# EAGLE board General IO (EAGLE 4.13), part 1 of 2
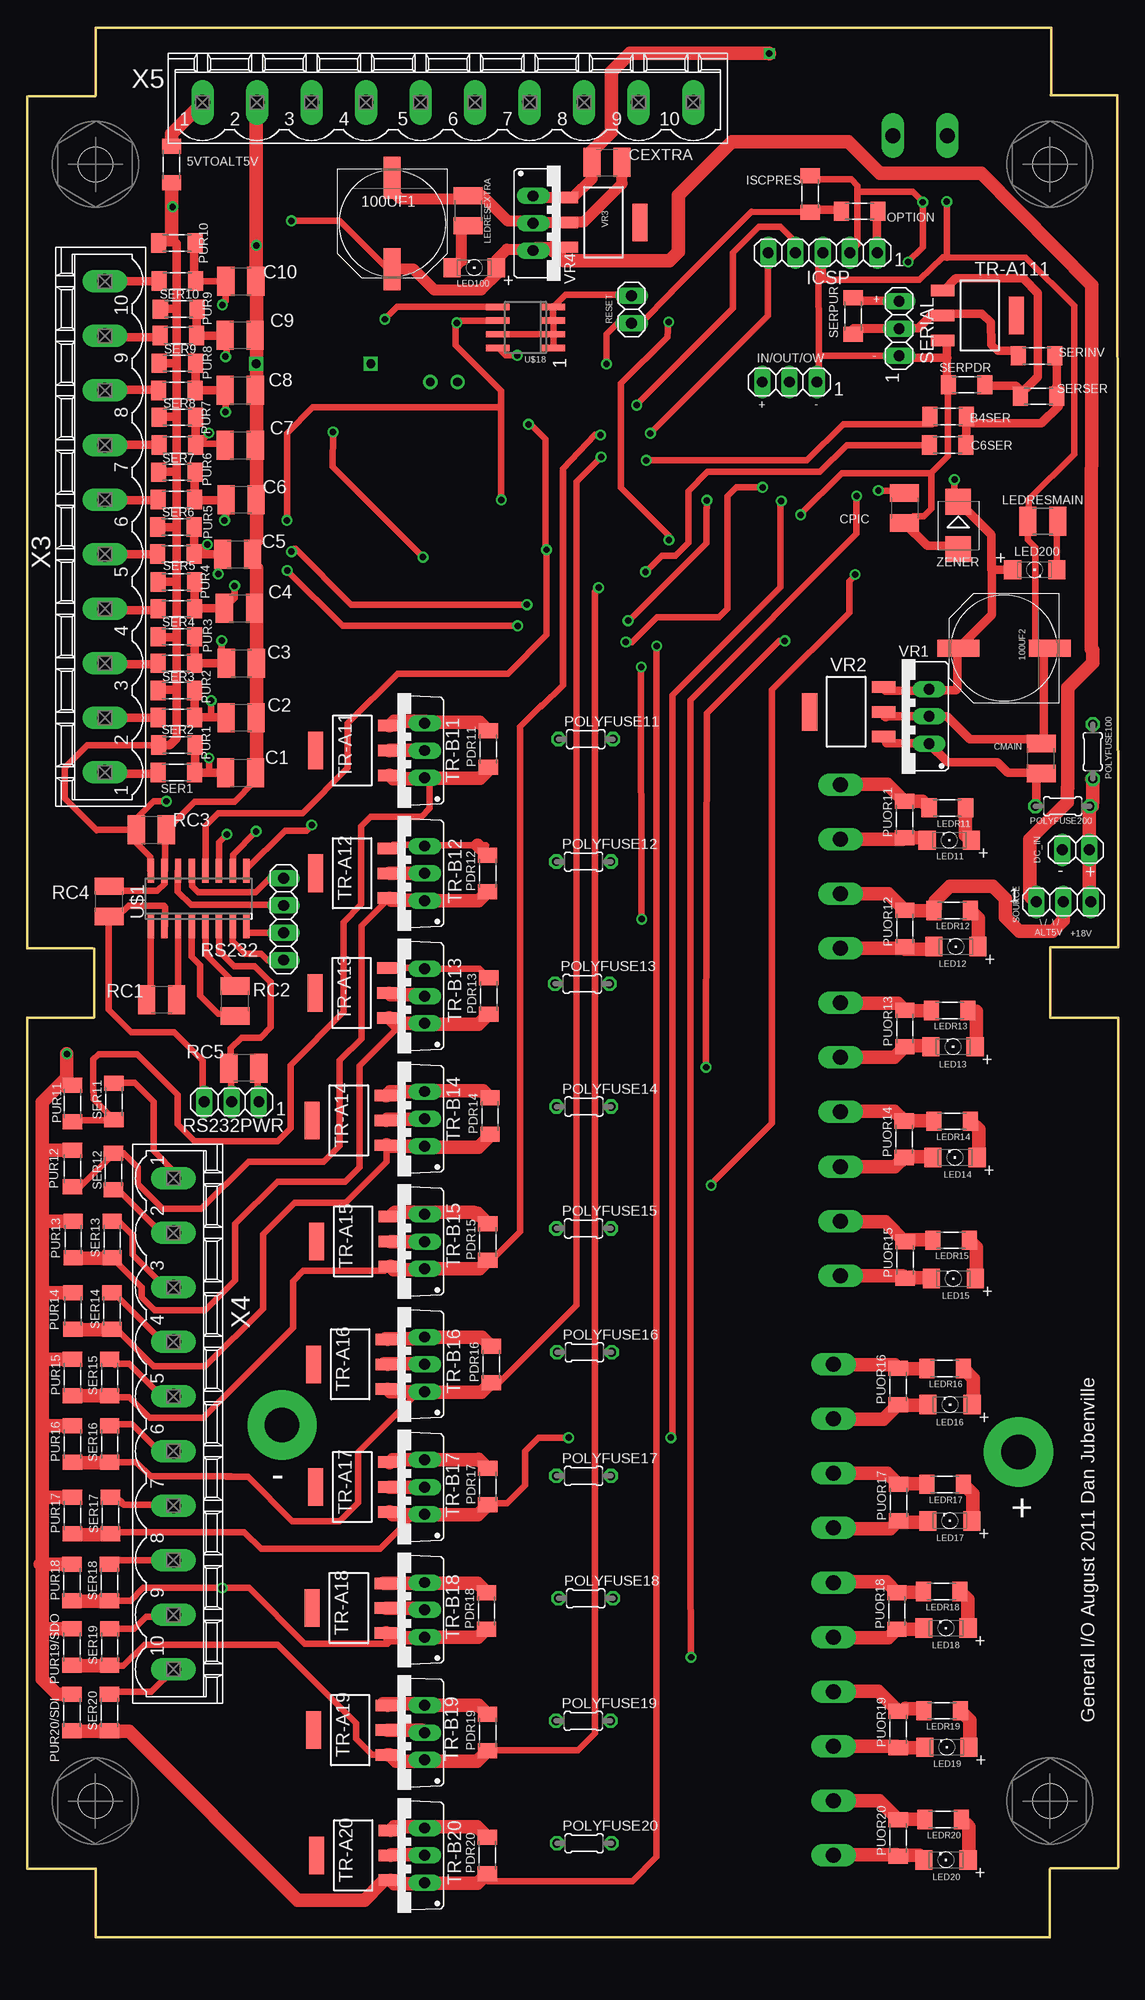
[diagram p0: board, top side]
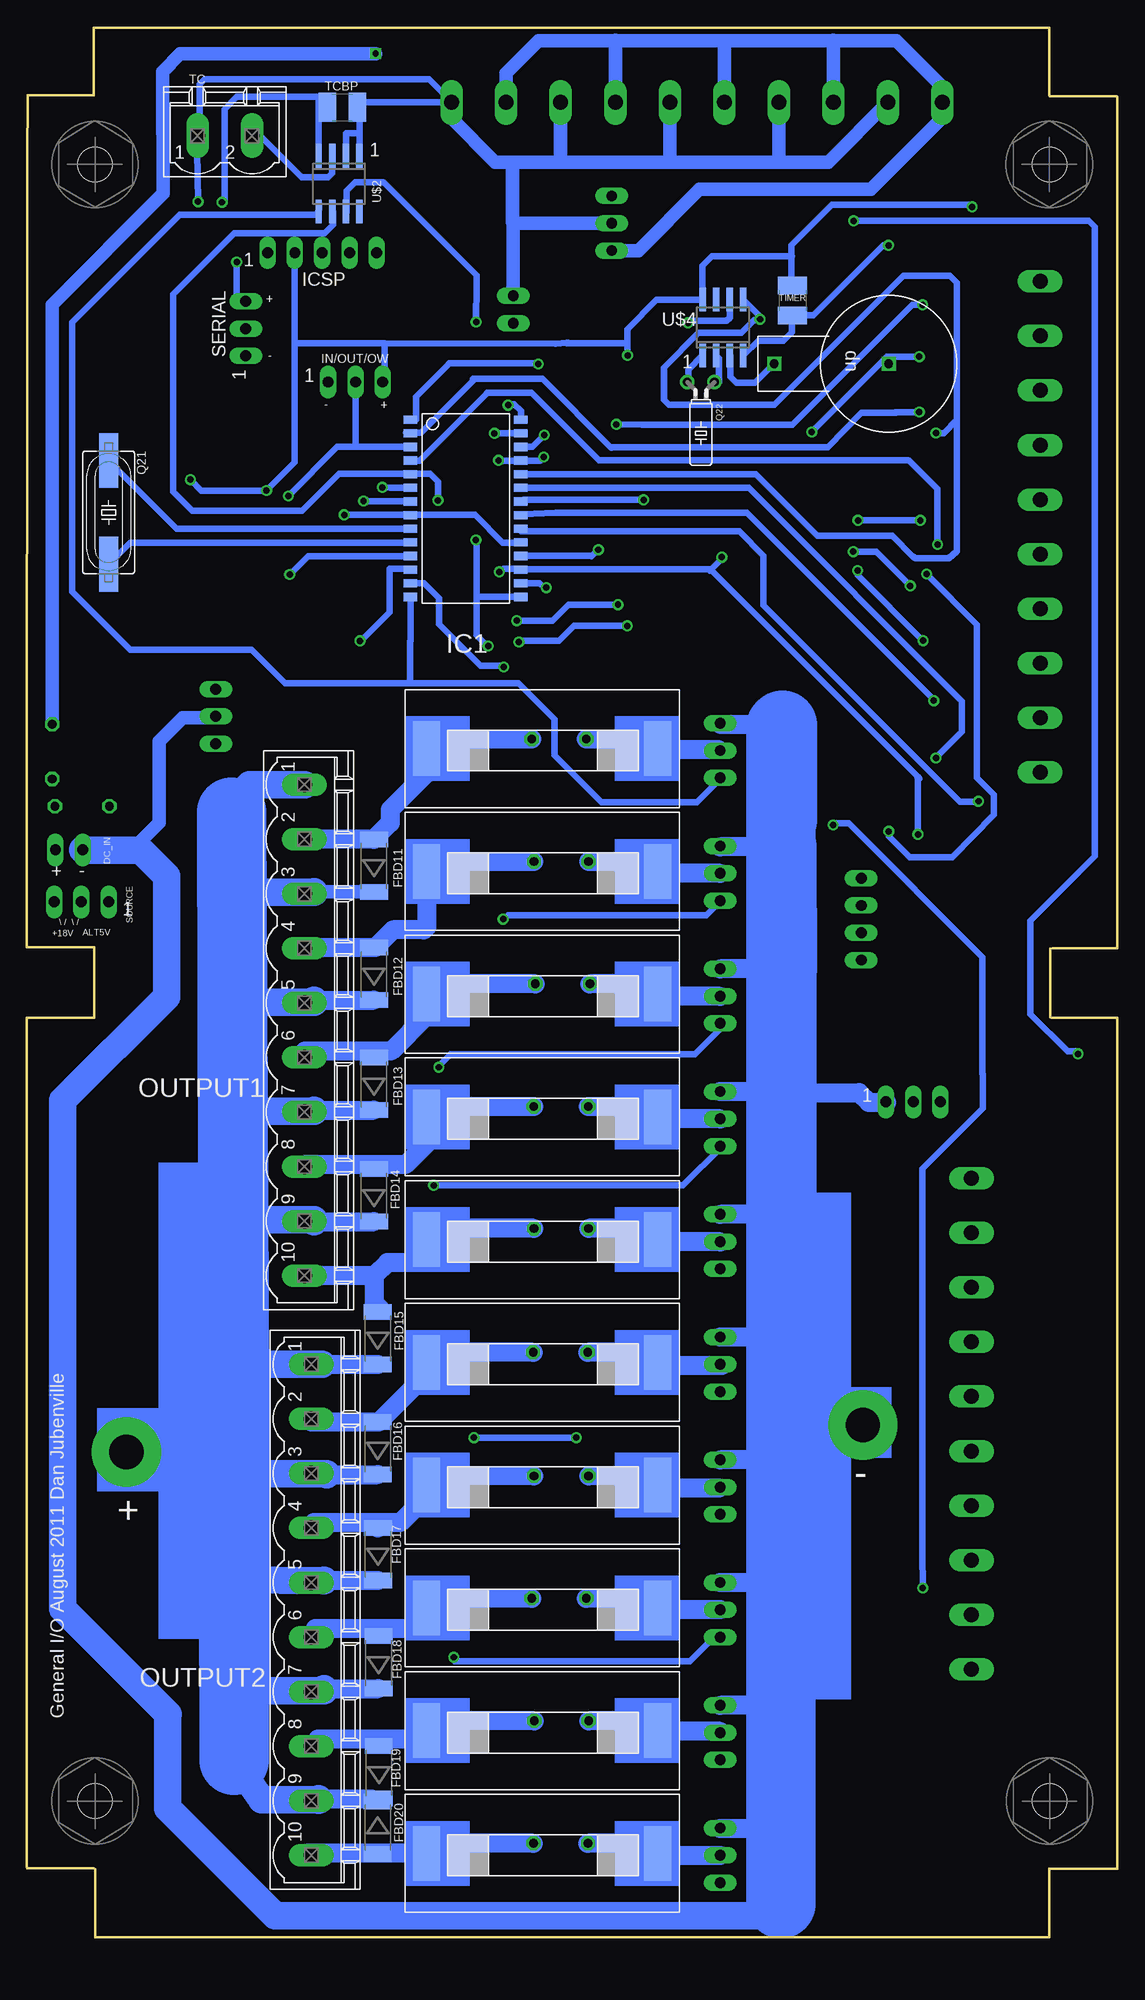
[diagram p1: board, bottom side, seen from below]

Size 101.6 x 177.83 mm. Coordinates in mm from the lower left corner, seen from the top.
Outline: 6.38,0 6.38,6.38 0,6.38 0,85.62 6.17,85.62 6.25,85.7 6.25,92.08 6.04,92.13 0.03,92.13 0,92.1 0,171.37 0.08,171.45 6.3,171.45 6.38,171.53 6.38,177.82 95.38,177.82 95.38,171.68 95.35,171.53 101.52,171.53 101.55,165.43 101.6,92.2 95.3,92.2 95.3,85.62 101.6,85.62 101.6,6.53 101.55,6.45 95.35,6.45 95.22,6.33 95.22,0 6.4,0
Copper layers (1*16): Top 0.035mm / dielectric 1.5mm / Bottom 0.035mm
Design rules "default": minimum track width 15mil, minimum drill 20mil, track to track 15mil, track to pad 15mil, pad to pad 15mil, via to via 15mil, smd to smd 0mil, copper to edge 5mil, drill to drill 5mil, minimum pad ring 10mil, minimum via ring 8mil, stop-mask expansion 4mil, vias tented up to drill 0mil, thermal gap 10mil

## Footprints (pad centres in the part's own frame; a part is rotated, then mirrored left to right if it is on the bottom)
M1406 = smd 1.4 x 1.8: 1 -1.7,0; 2 1.7,0
PANASONIC_G = smd 3.9 x 1.6: + 4.25,0; - -4.25,0
BH-401 = drill 0.8 square: P$1 0,0; P$2 0,10.668
C1210 = smd 1.6 x 2.7: 1 -1.4,0; 2 1.4,0
1X02 = drill 1.016 long: 1 -1.27,0; 2 1.27,0
SOD87 = smd 1.45 x 2.6: 1 -2.445,0; 2 2.445,0
FUSE = smd 2.54 x 5.08: P$1 2,5.54; P$2 23.54,5.54
SO-28W = smd 0.762 x 1.27: 1 -7.62,-5.207; 2 -6.35,-5.207; 3 -5.08,-5.207; 4 -3.81,-5.207; 5 -2.54,-5.207; 6 -1.27,-5.207; 7 0,-5.207; 8 1.27,-5.207; 9 2.54,-5.207; 10 3.81,-5.207; 11 5.08,-5.207; 12 6.35,-5.207; 13 7.62,-5.207; 14 8.89,-5.207; 15 8.89,5.08; 16 7.62,5.08; 17 6.35,5.08; 18 5.08,5.08; 19 3.81,5.08; 20 2.54,5.08; 21 1.27,5.08; 22 0,5.08; 23 -1.27,5.08; 24 -2.54,5.08; 25 -3.81,5.08; 26 -5.08,5.08; 27 -6.35,5.08; 28 -7.62,5.08
1X05 = drill 1.016 long: 1 -5.08,0; 2 -2.54,0; 3 0,0; 4 2.54,0; 5 5.08,0
1X03 = drill 1.016 long: 1 -2.54,0; 2 0,0; 3 2.54,0
1206 = smd 1.6 x 1.803: + -1.422,0; - 2.692,0
R1210 = smd 1.6 x 2.7: 1 -1.4,0; 2 1.4,0
MSTBV10 = drill 1.397 long: 1 -22.86,0; 2 -17.78,0; 3 -12.7,0; 4 -7.62,0; 5 -2.54,0; 6 2.54,0; 7 7.62,0; 8 12.7,0; 9 17.78,0; 10 22.86,0
0204/5 = drill 0.813 octagon: 1 -2.54,0; 2 2.54,0
SM49 = smd 5.08 x 1.778: 1 -4.826,0; 2 4.826,0
TC26H = drill 0.813 round: 1 -1.27,0; 2 1.27,0
1X04 = drill 1.016 long: 1 -3.81,0; 2 -1.27,0; 3 1.27,0; 4 3.81,0
MSTBV2 = drill 1.397 long: 1 -2.54,0; 2 2.54,0
SOT223R_INFINEON = smd 1.067 x 2.184: 1 -2.311,-3.479; 2 0,-3.48; 3 2.312,-3.48 | smd 3.5 x 1.4: 4 0,3.404
TO220BV = drill 1.016 long: D 0,-2.54; G -2.54,-2.54; S 2.54,-2.54
SO16 = smd 0.6 x 2.2: 1 -4.445,-2.6; 2 -3.175,-2.6; 3 -1.905,-2.6; 4 -0.635,-2.6; 5 0.635,-2.6; 6 1.905,-2.6; 7 3.175,-2.6; 8 4.445,-2.6; 9 4.445,2.6; 10 3.175,2.6; 11 1.905,2.6; 12 0.635,2.6; 13 -0.635,2.6; 14 -1.905,2.6; 15 -3.175,2.6; 16 -4.445,2.6
SO08 = smd 0.6 x 2.2: 1 -1.905,-2.6; 2 -0.635,-2.6; 3 0.635,-2.6; 4 1.905,-2.6; 5 1.905,2.6; 6 0.635,2.6; 7 -0.635,2.6; 8 -1.905,2.6
SCREW = hole 3.2: 0,0
TO220S = drill 1.016 long: 1 -2.54,-2.54; 2 0,-2.54; 3 2.54,-2.54
SMB = smd 2.4 x 2.4: A 2.2,0; C -2.2,0

## Placement (x,y rotation side)
5VTOALT5V  0  [M1406]  13.44,165.07 270 top
100UF1  Extra power  [PANASONIC_G]  33.99,159.59 270 top
100UF2  Main Power  [PANASONIC_G]  90.98,120.04 180 top
B4SER  [M1406]  85.78,141.63 180 top
BAT1  BH-401  [BH-401]  31.98,146.53 270 bottom
C1  .1uf  [C1210]  19.86,108.46 0 top
C2  .1uf  [C1210]  19.91,113.59 0 top
C3  .1uf  [C1210]  19.94,118.64 0 top
C4  .1uf  [C1210]  19.76,123.77 0 top
C5  .1uf  [C1210]  19.58,128.8 0 top
C6  .1uf  [C1210]  19.91,133.88 0 top
C6SER  [M1406]  85.72,138.96 0 top
C7  .1uf  [C1210]  19.84,138.94 0 top
C8  .1uf  [C1210]  19.84,144.07 0 top
C9  .1uf  [C1210]  19.81,149.2 0 top
C10  .1uf  [C1210]  19.89,154.2 0 top
CEXTRA  .1uf Extra power  [C1210]  54,165.28 0 top
CMAIN  .1uf main  [C1210]  94.44,109.78 90 top
CPIC  .1uf PIC Bypass  [C1210]  81.71,133.1 270 top
DC_IN  [1X02]  97.66,101.27 180 top
FBD11  [SOD87]  69.27,99.8 90 bottom
FBD12  [SOD87]  69.27,89.71 90 bottom
FBD13  [SOD87]  69.27,79.48 90 bottom
FBD14  [SOD87]  69.27,69.09 90 bottom
FBD15  [SOD87]  68.91,55.8 90 bottom
FBD16  [SOD87]  68.91,45.54 90 bottom
FBD17  [SOD87]  68.88,35.69 90 bottom
FBD18  [SOD87]  68.83,25.6 90 bottom
FBD19  [SOD87]  68.81,15.37 90 bottom
FBD20  [SOD87]  68.91,10.21 270 bottom
FUSE9  FUSE(SM)  [FUSE]  40.82,24.79 180 bottom
FUSE11  FUSE(SM)  [FUSE]  40.82,116.23 180 bottom
FUSE12  FUSE(SM)  [FUSE]  40.82,104.8 180 bottom
FUSE13  FUSE(SM)  [FUSE]  40.82,93.37 180 bottom
FUSE14  FUSE(SM)  [FUSE]  40.82,81.94 180 bottom
FUSE15  FUSE(SM)  [FUSE]  40.82,70.51 180 bottom
FUSE16  FUSE(SM)  [FUSE]  40.82,59.08 180 bottom
FUSE17  FUSE(SM)  [FUSE]  40.82,47.65 180 bottom
FUSE18  FUSE(SM)  [FUSE]  40.82,36.22 180 bottom
FUSE20  FUSE(SM)  [FUSE]  40.82,13.36 180 bottom
IC1  PIC16F876ASO  [SO-28W]  60.66,133.71 270 bottom
ICSP  [1X05]  74.09,156.87 180 top
IN/OUT/OW  [1X03]  70.99,144.83 180 top
ISCPRES  10k  [M1406]  72.92,162.36 90 top
LED11  [1206]  86.51,102.16 180 top
LED12  [1206]  87.12,92.25 180 top
LED13  [1206]  86.87,82.93 180 top
LED14  [1206]  87.05,72.62 180 top
LED15  [1206]  86.89,61.34 180 top
LED16  [1206]  86.59,49.61 180 top
LED17  [1206]  86.56,38.79 180 top
LED18  [1206]  86.21,28.8 180 top
LED19  [1206]  86.28,17.7 180 top
LED20  [1206]  86.21,7.21 180 top
LED100  Extra Power  [1206]  42.27,155.47 180 top
LED200  Main power  [1206]  93.19,127.36 0 top
LEDR11  [M1406]  85.7,105.18 180 top
LEDR12  [M1406]  86.13,95.63 180 top
LEDR13  [M1406]  85.93,86.31 180 top
LEDR14  [M1406]  86.16,76 180 top
LEDR15  [M1406]  86.06,64.92 180 top
LEDR16  [M1406]  85.47,52.98 180 top
LEDR17  [M1406]  85.47,42.19 180 top
LEDR18  [M1406]  85.17,32.21 180 top
LEDR19  [M1406]  85.22,21.11 180 top
LEDR20  [M1406]  85.29,10.97 180 top
LEDRESEXTRA  [R1210]  41.07,160.78 90 top
LEDRESMAIN  [R1210]  94.59,131.85 180 top
OPTION  470  [M1406]  77.52,160.73 0 top
OUTPUT1  MSTBV10  [MSTBV10]  75.74,84.48 270 bottom
OUTPUT2  MSTBV10  [MSTBV10]  75.11,30.51 270 bottom
PDR11  [M1406]  42.93,110.64 90 top
PDR12  [M1406]  42.88,99.09 90 top
PDR13  [M1406]  42.98,87.66 90 top
PDR14  [M1406]  43.1,76.48 90 top
PDR15  [M1406]  42.9,64.74 90 top
PDR16  [M1406]  43.21,53.37 90 top
PDR17  [M1406]  42.9,41.99 90 top
PDR18  [M1406]  42.77,30.4 90 top
PDR19  [M1406]  42.88,19.08 90 top
PDR20  [M1406]  42.85,7.65 90 top
POLYFUSE11  [0204/5]  52.02,111.58 0 top
POLYFUSE12  [0204/5]  51.82,100.18 0 top
POLYFUSE13  [0204/5]  51.69,88.8 0 top
POLYFUSE14  [0204/5]  51.84,77.37 0 top
POLYFUSE15  [0204/5]  51.82,66.01 0 top
POLYFUSE16  [0204/5]  51.89,54.48 0 top
POLYFUSE17  [0204/5]  51.82,42.98 0 top
POLYFUSE18  [0204/5]  52.02,31.57 0 top
POLYFUSE19  [0204/5]  51.79,20.17 0 top
POLYFUSE20  [0204/5]  51.87,8.76 0 top
POLYFUSE100  Extra Power  [0204/5]  99.24,110.41 90 top
POLYFUSE200  Main power  [0204/5]  96.44,105.33 180 top
PUOR11  [M1406]  81.71,104.09 90 top
PUOR12  [M1406]  81.74,93.93 90 top
PUOR13  [M1406]  81.74,84.63 90 top
PUOR14  [M1406]  81.69,74.32 90 top
PUOR15  [M1406]  81.76,63.09 90 top
PUOR16  [M1406]  81.1,51.31 90 top
PUOR17  [M1406]  81.15,40.49 90 top
PUOR18  [M1406]  81,30.4 90 top
PUOR19  [M1406]  81.13,19.38 90 top
PUOR20  [M1406]  81.13,9.27 90 top
PUR1  [M1406]  13.94,111.02 0 top
PUR2  [M1406]  13.89,116.1 0 top
PUR3  [M1406]  13.89,121.11 0 top
PUR4  [M1406]  13.87,126.21 0 top
PUR5  [M1406]  13.84,131.32 0 top
PUR6  [M1406]  13.92,136.42 0 top
PUR7  [M1406]  13.97,141.55 0 top
PUR8  [M1406]  14,146.58 0 top
PUR9  [M1406]  14.1,151.61 0 top
PUR10  [M1406]  13.92,157.78 0 top
PUR11  [M1406]  4.22,77.65 270 top
PUR12  [M1406]  4.19,71.58 270 top
PUR13  [M1406]  4.27,65 270 top
PUR14  [M1406]  4.24,58.32 270 top
PUR15  [M1406]  4.22,52.15 90 top
PUR16  [M1406]  4.19,45.95 90 top
PUR17  [M1406]  4.19,39.29 90 top
PUR18  [M1406]  4.17,33.05 90 top
PUR19/SDO  [M1406]  4.17,27.05 90 top
PUR20/SDI  [M1406]  4.17,20.93 90 top
Q21  20MHz  [SM49]  93.98,132.69 270 bottom
Q22  32.768kHz  [TC26H]  38.81,144.83 180 bottom
RC1  1uf  [C1210]  12.52,87.33 0 top
RC2  1uf  [C1210]  19.35,87.2 90 top
RC3  1uf  [C1210]  11.56,103.15 0 top
RC4  1uf  [C1210]  7.62,96.47 90 top
RC5  1uf  [C1210]  20.17,80.95 180 top
RESET  [1X02]  56.29,151.59 270 top
RS232  [1X04]  23.88,94.82 90 top
RS232PWR  [1X03]  19.02,77.8 180 top
SER1  [M1406]  13.89,108.46 0 top
SER2  [M1406]  13.89,113.59 0 top
SER3  [M1406]  13.87,118.64 0 top
SER4  [M1406]  13.89,123.72 0 top
SER5  [M1406]  13.84,128.8 0 top
SER6  [M1406]  13.89,133.88 0 top
SER7  [M1406]  14,138.96 180 top
SER8  [M1406]  13.94,144.04 180 top
SER9  [M1406]  14.07,149.15 0 top
SER10  [M1406]  14,154.23 0 top
SER11  [M1406]  8.08,77.83 90 top
SER12  [M1406]  8.03,71.32 270 top
SER13  [M1406]  7.9,64.97 90 top
SER14  [M1406]  7.87,58.32 90 top
SER15  [M1406]  7.67,52.15 90 top
SER16  [M1406]  7.67,45.95 90 top
SER17  [M1406]  7.75,39.29 90 top
SER18  [M1406]  7.65,33.05 90 top
SER19  [M1406]  7.67,27.05 90 top
SER20  [M1406]  7.65,20.93 90 top
SERIAL  [1X03]  81.2,149.81 90 top
SERINV  [M1406]  94.03,147.27 180 top
SERPDR  220k  [M1406]  87.48,144.58 180 top
SERPUR  47k  [M1406]  76.91,150.98 270 top
SERSER  100k  [M1406]  94.18,143.51 180 top
SOURCE  [1X03]  96.52,96.42 0 top
TC  Type K  [MSTBV2]  83.16,167.77 0 bottom
TCBP  .1uf TC Bypass  [C1210]  72.21,170.41 0 bottom
TIMER  .1uf Timer Bypass  [C1210]  30.28,152.43 270 bottom
TR-A11  [SOT223R_INFINEON]  30.28,110.52 90 top
TR-A12  [SOT223R_INFINEON]  30.25,99.09 90 top
TR-A13  [SOT223R_INFINEON]  30.2,87.93 90 top
TR-A14  [SOT223R_INFINEON]  29.95,76.07 90 top
TR-A15  [SOT223R_INFINEON]  30.35,64.8 90 top
TR-A16  [SOT223R_INFINEON]  30.07,53.37 90 top
TR-A17  [SOT223R_INFINEON]  30.28,41.94 90 top
TR-A18  [SOT223R_INFINEON]  29.95,30.66 90 top
TR-A19  [SOT223R_INFINEON]  30.07,19.3 90 top
TR-A20  [SOT223R_INFINEON]  30.35,7.65 90 top
TR-A111  [SOT223R_INFINEON]  88.72,151.03 270 top
TR-B11  [TO220BV]  34.47,110.52 90 top
TR-B12  [TO220BV]  34.47,99.09 90 top
TR-B13  [TO220BV]  34.47,87.66 90 top
TR-B14  [TO220BV]  34.47,76.23 90 top
TR-B15  [TO220BV]  34.47,64.8 90 top
TR-B16  [TO220BV]  34.47,53.37 90 top
TR-B17  [TO220BV]  34.47,41.94 90 top
TR-B18  [TO220BV]  34.47,30.51 90 top
TR-B19  [TO220BV]  34.47,19.08 90 top
TR-B20  [TO220BV]  34.47,7.65 90 top
U$1  MAX232  [SO16]  15.95,96.72 0 top
U$2  MAX6674  [SO08]  72.52,163.3 180 bottom
U$4  M41T00TIMER-I2C  [SO08]  36.75,149.91 0 bottom
U$11  [SCREW]  6.32,12.7 0 top
U$13  [SCREW]  95.25,12.7 0 top
U$14  [SCREW]  95.25,165.1 0 top
U$15  [SCREW]  6.35,165.1 0 top
U$18  FM24C256  [SO08]  46.41,149.91 90 top
VR1  Main  [TO220S]  81.46,113.69 90 top
VR2  Main  [SOT223R_INFINEON]  76.28,114.12 90 top
VR3  Extra power  [SOT223R_INFINEON]  53.67,159.69 270 top
VR4  Extra power  [TO220S]  49.66,159.61 270 top
X3  Inputs 1  [MSTBV10]  7.21,131.34 90 top
X4  Inputs 2  [MSTBV10]  13.61,47.83 270 top
X5  Extra power  [MSTBV10]  39.17,170.87 0 top
ZENER  5.1V  [SMB]  86.71,131.48 270 top

## Library data of the parts
5VTOALT5V 100UF1 100UF2 B4SER BAT1 C1-C6 C6SER C7-C10 CEXTRA CMAIN CPIC FUSE9 FUSE11-FUSE18 FUSE20 IC1 ISCPRES LED11-LED20 LED100 LED200 LEDR11-LEDR20 LEDRESEXTRA LEDRESMAIN OPTION PDR11-PDR20 POLYFUSE11-POLYFUSE20 POLYFUSE100 POLYFUSE200 PUOR11-PUOR20 PUR1-PUR18 PUR19/SDO PUR20/SDI Q21 Q22 RC1-RC5 SER1-SER20 SERINV SERPDR SERPUR SERSER TCBP TIMER TR-A11-TR-A20 TR-A111 TR-B11-TR-B20 U$1 U$2 U$4 U$11 U$13-U$15 U$18 VR1-VR4 ZENER = 1 Dan's Common Parts
DC_IN ICSP IN/OUT/OW RESET RS232 RS232PWR SERIAL SOURCE = pinhead
FBD11-FBD20 = semicon-smd-ipc
OUTPUT1 OUTPUT2 TC X3-X5 = con-phoenix-508

## Nets
$N199: IC1.15 PDR20.1 PUR20/SDI.1 SER20.1 TR-A20.1 TR-B20.G U$2.7
+5V: 5VTOALT5V.2 100UF2.+ CPIC.1 IC1.20 ICSP.2 IN/OUT/OW.3 ISCPRES.2 LED200.+ PUR1.1 PUR2.1 PUR3.1 PUR4.1 PUR5.1 PUR6.1 PUR7.1 PUR8.1 PUR9.1 PUR10.1 RC3.1 SERIAL.3 SERPUR.1 TCBP.1 TIMER.1 U$1.16 U$2.4 U$4.8 U$18.8 VR1.3 VR2.3 ZENER.C
+18V: DC_IN.1 POLYFUSE100.1 POLYFUSE200.1 SOURCE.3
ALT5V: 5VTOALT5V.1 100UF1.+ LED100.+ PUR11.1 PUR12.1 PUR13.1 PUR14.1 PUR15.2 PUR16.2 PUR17.2 PUR18.2 PUR19/SDO.2 PUR20/SDI.2 SOURCE.1 VR3.3 VR4.3 X5.1 X5.3 X5.5 X5.7 X5.9
GND: 100UF1.- 100UF2.- BAT1.P$2 C1.2 C2.2 C3.2 C4.2 C5.2 C6.2 C7.2 C8.2 C9.2 C10.2 CEXTRA.2 CMAIN.2 CPIC.2 DC_IN.2 IC1.8 IC1.19 ICSP.3 IN/OUT/OW.1 LEDRESEXTRA.2 LEDRESMAIN.2 PDR11.2 PDR12.2 PDR13.2 PDR14.2 PDR15.2 PDR16.2 PDR17.2 PDR18.2 PDR19.2 PDR20.2 RC3.2 RC4.2 RC5.1 RESET.1 RS232PWR.1 SERIAL.1 SERPDR.2 TC.1 TCBP.2 TIMER.2 TR-A11.3 TR-A12.3 TR-A13.3 TR-A14.3 TR-A15.3 TR-A16.3 TR-A17.3 TR-A18.3 TR-A19.3 TR-A20.3 TR-A111.3 TR-B11.S TR-B12.S TR-B13.S TR-B14.S TR-B15.S TR-B16.S TR-B17.S TR-B18.S TR-B19.S TR-B20.S U$1.15 U$2.1 U$2.2 U$4.4 U$18.1 U$18.2 U$18.3 U$18.4 U$18.7 VR1.2 VR2.2 VR3.2 VR4.2 X5.2 X5.4 X5.6 X5.8 X5.10 ZENER.A
N$1: FUSE17.P$1 POLYFUSE17.1 TR-A17.2 TR-B17.D
N$2: FUSE9.P$1 POLYFUSE19.1 TR-A19.2 TR-B19.D
N$3: SER17.2 X4.7
N$4: FBD16.2 FUSE16.P$2 LED16.- OUTPUT2.2 POLYFUSE16.2 PUOR16.1
N$5: FBD17.2 FUSE17.P$2 LED17.- OUTPUT2.4 POLYFUSE17.2 PUOR17.1
N$6: FUSE16.P$1 POLYFUSE16.1 TR-A16.2 TR-B16.D
N$7: FUSE18.P$1 POLYFUSE18.1 TR-A18.2 TR-B18.D
N$8: IC1.7 PDR17.1 PUR17.1 SER17.1 TR-A17.1 TR-B17.G
N$9: FBD20.2 FUSE20.P$2 LED20.- OUTPUT2.10 POLYFUSE20.2 PUOR20.1
N$10: FBD18.2 FUSE18.P$2 LED18.- OUTPUT2.6 POLYFUSE18.2 PUOR18.1
N$11: IC1.16 PDR19.1 PUR19/SDO.1 SER19.1 TR-A19.1 TR-B19.G
N$12: C8.1 IC1.2 PUR8.2 SER8.1
N$13: FBD19.2 FUSE9.P$2 LED19.- OUTPUT2.8 POLYFUSE19.2 PUOR19.1
N$14: FUSE20.P$1 POLYFUSE20.1 TR-A20.2 TR-B20.D
N$15: C2.1 IC1.21 PUR2.2 SER2.2
N$16: FBD12.2 FUSE12.P$2 LED12.- OUTPUT1.4 POLYFUSE12.2 PUOR12.1
N$17: FUSE15.P$1 POLYFUSE15.1 TR-A15.2 TR-B15.D
N$18: FBD15.2 FUSE15.P$2 LED15.- OUTPUT1.10 POLYFUSE15.2 PUOR15.1
N$19: RS232.1 U$1.7
N$20: SER16.2 X4.6
N$21: FUSE14.P$1 POLYFUSE14.1 TR-A14.2 TR-B14.D
N$22: FBD14.2 FUSE14.P$2 LED14.- OUTPUT1.8 POLYFUSE14.2 PUOR14.1
N$23: FUSE13.P$1 POLYFUSE13.1 TR-A13.2 TR-B13.D
N$24: FBD13.2 FUSE13.P$2 LED13.- OUTPUT1.6 POLYFUSE13.2 PUOR13.1
N$25: SER14.2 X4.4
N$26: SER12.2 X4.2
N$27: FUSE12.P$1 POLYFUSE12.1 TR-A12.2 TR-B12.D
N$28: SER13.2 X4.3
N$29: FUSE11.P$1 POLYFUSE11.1 TR-A11.2 TR-B11.D
N$30: FBD11.2 FUSE11.P$2 LED11.- OUTPUT1.2 POLYFUSE11.2 PUOR11.1
N$31: IC1.28 ICSP.4
N$32: SER15.2 X4.5
N$33: C1.1 IC1.23 PUR1.2 SER1.2
N$34: ICSP.1 OPTION.2
N$35: IC1.10 Q21.2
N$36: SERPDR.1 SERSER.2 TR-A111.1
N$37: IC1.1 ISCPRES.1 OPTION.1 RESET.2
N$38: SERIAL.2 SERINV.2 SERPUR.2 TR-A111.2
N$39: IC1.9 Q21.1
N$40: IC1.27 ICSP.5
N$41: C10.1 IC1.18 PUR10.2 SER10.2 U$1.12
N$42: SER9.1 X3.9
N$43: C5.1 IC1.4 PUR5.2 SER5.2 U$1.10
N$44: C6SER.1 C9.1 IC1.17 PUR9.2 SER9.2 U$1.11
N$45: RS232.2 U$1.8
N$46: TC.2 U$2.3
N$47: CEXTRA.1 POLYFUSE100.2 VR3.1 VR4.1
N$49: RS232.3 U$1.14
N$52: FBD11.1 FBD12.1 FBD13.1 FBD14.1 FBD15.1 FBD16.1 FBD17.1 FBD18.1 FBD19.1 FBD20.1 LEDR11.2 LEDR12.2 LEDR13.2 LEDR14.2 LEDR15.2 LEDR16.2 LEDR17.2 LEDR18.2 LEDR19.2 LEDR20.2 OUTPUT1.1 OUTPUT1.3 OUTPUT1.5 OUTPUT1.7 OUTPUT1.9 OUTPUT2.1 OUTPUT2.3 OUTPUT2.5 OUTPUT2.7 OUTPUT2.9 PUOR11.2 PUOR12.2 PUOR13.2 PUOR14.2 PUOR15.2 PUOR16.2 PUOR17.2 PUOR18.2 PUOR19.2 PUOR20.2 SOURCE.2
N$53: Q22.1 U$4.2
N$54: Q22.2 U$4.1
N$55: LED200.- LEDRESMAIN.1
N$56: BAT1.P$1 U$4.3
N$60: RS232.4 U$1.13
N$63: CMAIN.1 POLYFUSE200.2 VR1.1 VR2.1
N$64: LED20.+ LEDR20.1
N$65: LED19.+ LEDR19.1
N$66: LED100.- LEDRESEXTRA.1
N$67: LED18.+ LEDR18.1
N$69: LED17.+ LEDR17.1
N$70: LED16.+ LEDR16.1
N$71: LED15.+ LEDR15.1
N$72: LED14.+ LEDR14.1
N$73: LED13.+ LEDR13.1
N$74: LED12.+ LEDR12.1
N$75: LED11.+ LEDR11.1
N$77: SER3.1 X3.3
N$80: RC2.2 U$1.5
N$81: RC1.2 U$1.3
N$82: RC2.1 U$1.4
N$83: RC1.1 U$1.1
N$84: RC4.1 RS232PWR.3 U$1.2
N$85: RC5.2 RS232PWR.2 U$1.6
N$86: SER4.1 X3.4
N$87: SER5.1 X3.5
N$88: SER8.2 X3.8
N$89: SER1.1 X3.1
N$90: IC1.14 PDR11.1 PUR11.2 SER11.1 TR-A11.1 TR-B11.G U$2.5
N$91: SER2.1 X3.2
N$92: SER11.2 X4.1
N$93: IC1.13 PDR12.1 PUR12.2 SER12.1 TR-A12.1 TR-B12.G
N$94: IC1.12 PDR13.1 PUR13.2 SER13.1 TR-A13.1 TR-B13.G
N$95: C4.1 IC1.5 PUR4.2 SER4.2 U$2.6
N$97: C3.1 IC1.6 PUR3.2 SER3.2
N$98: IC1.11 PDR14.1 PUR14.2 SER14.1 TR-A14.1 TR-B14.G
N$99: B4SER.2 IC1.25 PDR16.1 PUR16.1 SER16.1 TR-A16.1 TR-B16.G
N$100: SER19.2 X4.9
N$101: IC1.26 PDR15.1 PUR15.1 SER15.1 TR-A15.1 TR-B15.G
N$102: SER18.2 X4.8
N$104: B4SER.1 C6SER.2 SERINV.1 SERSER.1
N$105: SER20.2 X4.10
N$106: SER6.1 X3.6
N$107: C6.1 IC1.22 PUR6.2 SER6.2 U$4.6 U$18.6
N$108: SER7.2 X3.7
N$109: SER10.1 X3.10
N$111: C7.1 IC1.24 PUR7.2 SER7.1 U$4.5 U$18.5
SER18: IC1.3 IN/OUT/OW.2 PDR18.1 PUR18.1 SER18.1 TR-A18.1 TR-B18.G U$1.9